# Altium PCB JacdacMicroBitBackPack 94.PcbDoc
Units mm, origin at the board's own origin, x right, y up, seen from the top; angles counter-clockwise.
Board outline 35.46 x 12 mm, 2 copper layers (Top Layer, Bottom Layer), stack 1.525 mm thick; 15 components, 7 nets, 39 pads, 6 vias.
Unrouted connection lines stored in the file: 3.
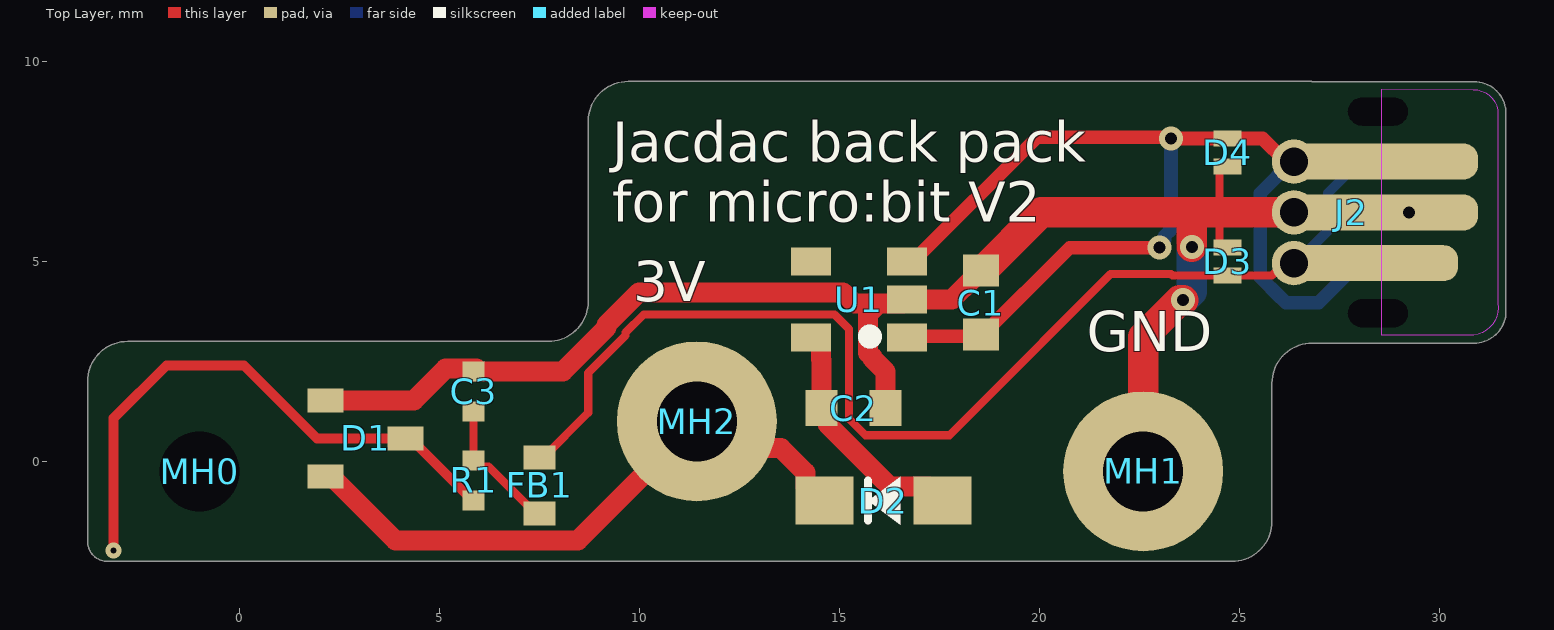
[diagram p0: Top Layer view]
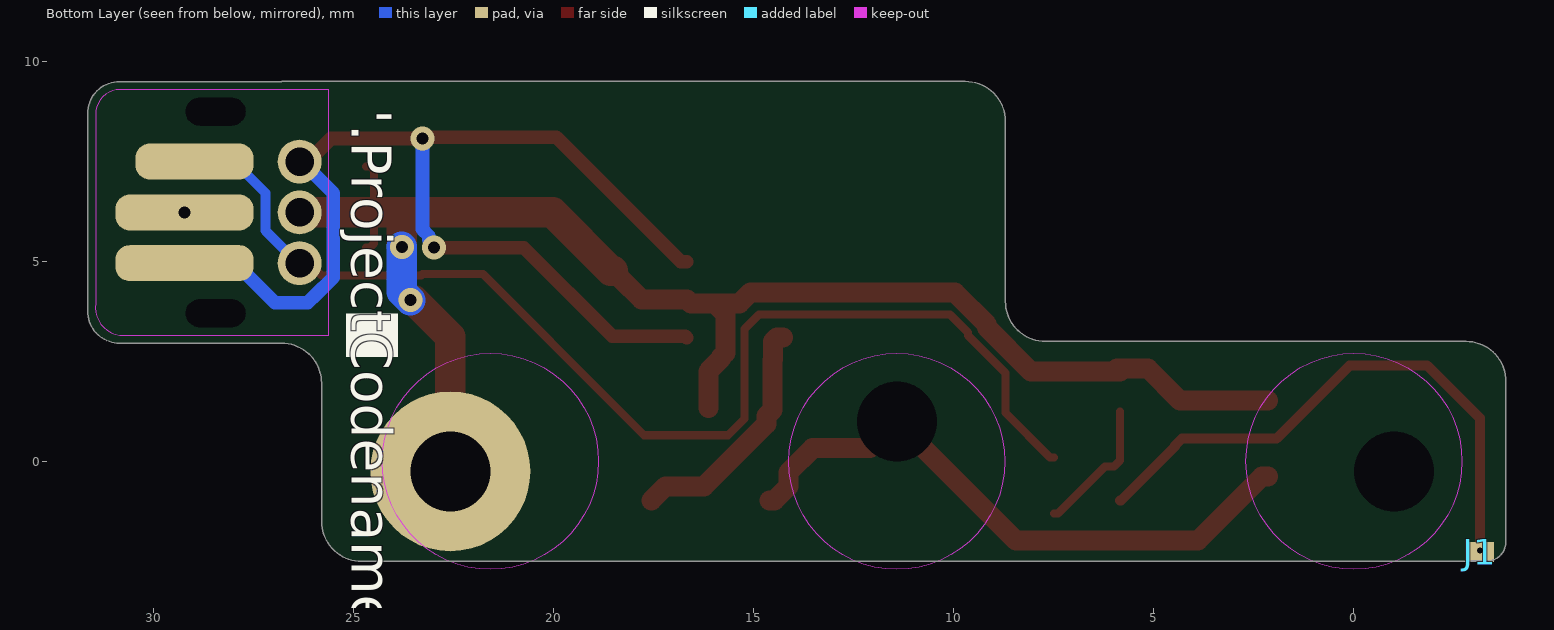
[diagram p1: Bottom Layer view, seen from below]

## Layer stack, top to bottom
Top Solder: solder mask 0.0102, Solder Resist, Dk 3.5
Top Layer: signal copper 0.0356
Dielectric 1: core 1.454, FR-4, Dk 4.2
Bottom Layer: signal copper 0.0356
Bottom Solder: solder mask 0.0102, Solder Resist, Dk 3.5

## Board outline
-3.8,-2 ccw(c-3.3,-2) -3.3,-2.5 24.809,-2.5 ccw(c24.809,-1.5) 25.809,-1.5 25.809,0.955 25.81,0.955 25.81,1.955 cw(c26.81,1.955) 26.81,2.955 30.86,2.955 ccw(c30.86,3.755) 31.66,3.755 31.66,8.695 ccw(c30.86,8.695) 30.86,9.495 26.81,9.495 26.81,9.5 9.715,9.5 ccw(c9.715,8.5) 8.715,8.5 8.715,4 cw(c7.715,4) 7.715,3 -2.8,3 ccw(c-2.8,2) -3.8,2

## Design rules (kind name [scope] priority, off if disabled: settings)
AssemblyTestPointUsage [All] p1: valid=2
BoardOutlineClearance IGNORE_ALIGNMENT_HOLES [InComponent('J1')] p1: gap=0.075 ignorepadtopadclearanceinfootprint=FALSE except(0: Track-OutlineEdge SMDPad-OutlineEdge THPad-OutlineEdge Via-OutlineEdge)
BoardOutlineClearance IGNORE_KEEPOUT [IsKeepOut] p2: gap=0 ignorepadtopadclearanceinfootprint=FALSE
BoardOutlineClearance "allow back pack connection on board edge" [(IsVia And InNet('JD_DATA_MCU')) or (IsPad And InNet('JD_DATA_MCU'))] p3: gap=0 ignorepadtopadclearanceinfootprint=FALSE
BoardOutlineClearance [All] p4: gap=0.25 ignorepadtopadclearanceinfootprint=FALSE except(0.15: Text-OutlineEdge)
Clearance CLEARANCE_MH [IsKeepOut vs InComponent('MH1') or InComponent('MH2')] p1: gap=0 ignorepadtopadclearanceinfootprint=FALSE except(1: THPad-Fill THPad-Poly THPad-Region)
Clearance CLEARANCE_POLY_DC_DC [InNamedPolygon('DC_DC_VUBIT') or InNamedPolygon('DC_DC_4V05') or InNamedPolygon('DC_DC_GND') or InComponent('J1')] p2: gap=0 ignorepadtopadclearanceinfootprint=FALSE except(0.15: Fill-Fill Fill-Poly Fill-Region Poly-Poly Poly-Region Region-Region)
Clearance [All] p3: gap=0.125 ignorepadtopadclearanceinfootprint=FALSE
DiffPairsRouting [All] p1: maxlimit=2 minlimit=0.15 mostfreqgap=0.15 toplayer_minwidth=0.15 toplayer_maxwidth=2 toplayer_prefwidth=0.15 bottomlayer_minwidth=0.15 bottomlayer_maxwidth=2 bottomlayer_prefwidth=0.15 maxuncoupledlength=25
FabricationTestPointUsage [All] p1: valid=2 allowmultiple=FALSE
HoleSize HoleSize_1 [IsVia And InNet('JD_DATA_MCU')] p1: absolutevalues=TRUE maxlimit=2.54 minlimit=0.15 maxpercent=80.000 minpercent=20.000
HoleSize [All] p2: absolutevalues=TRUE maxlimit=5 minlimit=0.2 maxpercent=80.000 minpercent=20.000
MinimumSolderMaskSliver [All] p1: minsoldermaskwidth=0.005
PlaneClearance [All] p1: clearance=0.3
PlaneConnect [All] p1: planeconnectstyle=Relief reliefexpansion=0.5 reliefentries=4 reliefconductorwidth=0.2 reliefairgap=0.3
PolygonConnect CONNECT_POLY_DC_DC [IsNamedPolygon('DC_DC_GND') or IsNamedPolygon('DC_DC_VUBIT') or IsNamedPolygon('GND') or IsNamedPolygon('DC_DC_4V05')] p1: connectstyle=Relief reliefconductorwidth=0.254 reliefentries=4 polygonreliefangle="90 Angle" airgapwidth=0
PolygonConnect [All] p2: connectstyle=Relief reliefconductorwidth=0.2 reliefentries=4 polygonreliefangle="90 Angle" airgapwidth=0.2
RoutingVias RoutingVias_1 [IsVia And InNet('JD_DATA_MCU')] p1: holewidth=0.2 width=0.6 viastyle="Through Hole" minholewidth=0.15 minwidth=0.4 maxholewidth=0.5 maxwidth=1
RoutingVias [All] p2: holewidth=0.3 width=0.6 viastyle="Through Hole" minholewidth=0.3 minwidth=0.6 maxholewidth=0.3 maxwidth=0.8
SilkToSilkClearance [All] p1: silktosilkclearance=0.001
SilkToSolderMaskClearance [IsPad] p1: minsilkscreentomaskgap=0.05 clearancetoexposedcopper=TRUE
SolderMaskExpansion SolderMaskExpansion_1 [IsVia] p1: expansion=0.102 istentingtop=TRUE useseparateexpansions=TRUE expansionbottom=0.102 istentingbottom=TRUE
SolderMaskExpansion [All] p2: expansion=0.075 istentingtop=FALSE
Width [All] p1: maxlimit=2 minlimit=0.15 preferedwidth=0.15 minimp=50.000000 maximp=50.000000 favimp=50.000000
21 further rules are at their usual default settings.

## Components (designator, comment, footprint, x,y, rotation, side; value= is the part's Value field where it differs from the comment)
C1 "1uF 16V" "C0603 - without outline" 18.53,3.969 r270 top
C2 "1uF 16V" "C0603 - without outline" 15.343,1.329 r180 top
C3 "CL05C330JB51PNC" "C0402_0.55MM - without outline" 5.85,1.75 r270 top
D1 "BAT54S" "NXP-BAT54S-TO-236AB - without outline" 3.15,0.575 r0 top
D2 "MBR120VLSFT3G" MBR120VLSFT3G 16.093,-0.978 r0 top
D3 "RCLAMP0521P-N" "TVS 0402 - L" 24.7,5 r90 top
D4 "RCLAMP0521P-N" "TVS 0402 - L" 24.7,7.722 r270 top
FB1 "TDK MPZ1608S102ATA00" "TDK MPZ1608 0.8mm - without outline" 7.5,-0.6 r270 top
J1 "microbit edge connector for Jacdac back pack" MICROBIT_EDGE_CONNECTOR_BACK_PACK -3.15,-2.27 r180 bottom
J2 "Jacdac edge connector" JACDAC_EDGE_CONNECTOR_NO_TRACES 25.81,6.225 r270 top
MH0 "MH_4.0MMK_0MMC_2.0MMD_NPTH" MH_4.0MMK_0MMC_2.0MMD_NPTH -1,-0.25 r0 top
MH1 "MH_5.0MMK_4.0MMC_2.0MMD_PTH" MH_5.0MMK_4.0MMC_2.0MMD_PTH#1 22.59,-0.25 r0 top
MH2 "MH_5.0MMK_4.0MMC_2.0MMD_PTH" MH_5.0MMK_4.0MMC_2.0MMD_PTH#2 11.43,1 r0 top
R1 "0402WGF2200TCE" "R0402 - Without outline" 5.85,-0.475 r90 top
U1 "ME6211C33M5G-N" MICRONE-SOT23-5 15.48,4.046 r180 top

## Footprints (in the part's own frame and the unit in brackets; to place one, negate y for a bottom-side part, rotate by r counter-clockwise, add the part's x,y. Pads: shape width x height; smd on the part's side, far side on the other; paste and mask are expansions set on the pad)
"C0402_0.55MM - without outline" [mm]
  rect 0.5x0.55 smd: 1(-0.5,0) 2(0.5,0)
  body extent -0.5,-0.25 0.5,0.25, height 0.55
"C0603 - without outline" [mm]
  rect 0.8x0.9 smd: 1(-0.8,0) 2(0.8,0)
  body extent -0.9,-0.5 0.9,0.5, height 0.9
JACDAC_EDGE_CONNECTOR_NO_TRACES [mm] "JacDac 3 pin connector with no traces"
  rrect78% 0.9x2.95 smd far side paste-1 mask+0: 1(-1.27,3.175)
  rrect78% 0.9x4.3 smd paste-1 mask+0: 1(1.27,2.5)
  round 1.11 / inner round 0.71 / far side round 1.1 hole 0.71 paste-0.254 mask+0: 1(1.27,0.55) 2(0,0.55) 3(-1.27,0.55)
  rrect78% 0.9x3.45 smd far side paste-1 mask+0: 2(0,3.425) 3(1.27,3.425)
  rrect78% 0.9x4.8 smd paste-1 mask+0: 2(0,2.75) 3(-1.27,2.75)
  round 0 hole 0.7 slot 1.5 at 90 deg unplated: ""(-2.52,2.65) ""(2.52,2.65)
  Top Layer keep-out region: -3.075,2.75 -3.07,5.033 -2.987,5.341 -2.761,5.567 -2.453,5.65 -2.453,5.65 2.27,5.65 2.545,5.635 2.794,5.516 2.978,5.31 3.07,5.05 3.07,5.05 3.07,2.75
  Bottom Layer lines w0.2: -1.126,0.85 -1.27,0.85
  Bottom Layer keep-out region: -3.07,-0.173 -3.07,5.033 -3.023,5.269 -2.889,5.469 -2.689,5.603 -2.453,5.65 -2.453,5.65 2.27,5.65 2.545,5.635 2.794,5.516 2.978,5.31 3.07,5.05 3.07,5.05 3.07,-0.173
MBR120VLSFT3G [mm] "SODFL, 2-Leads, Body 1.65x3.60mm, IPC Medium Density"
  rect 1.45x1.2 smd: 1(-1.475,0) 2(1.475,0)
  silkscreen extent -0.38,-0.6 0.42,0.6, body extent -1.73,-0.82 1.72,0.82, height 0.95
MH_4.0MMK_0MMC_2.0MMD_NPTH [mm] "Mounting hole 4.0mm clearance, no copper and 2.0mm NPTH"
  round 0 hole 2 unplated mask+0.05: 1(0,0)
MH_5.0MMK_4.0MMC_2.0MMD_PTH#1 [mm] "Mounting hole 5.0mm clearance, 4.0mm annular ring and 2.0mm PTH"
  round 4 hole 2 mask+0.5: 1(0,0)
MH_5.0MMK_4.0MMC_2.0MMD_PTH#2 [mm] "Mounting hole 5.0mm clearance, 4.0mm annular ring and 2.0mm PTH"
  round 4 / inner round 4 / far side round 0 hole 2 unplated mask+0.5: 1(0,0)
MICROBIT_EDGE_CONNECTOR_BACK_PACK [mm]
  rect 0.7x0.5 smd paste-1: 1(0,0)
MICRONE-SOT23-5 [mm]
  rect 1x0.7 smd: 1(-1.2,0.95) 2(-1.2,0) 3(-1.2,-0.95) 4(1.2,-0.95) 5(1.2,0.95)
  silkscreen extent -0.33,0.88 -0.23,0.97, body extent -1.32,-1.5 1.32,1.5, height 1.11
"NXP-BAT54S-TO-236AB - without outline" [mm] "SOT23, 3-Leads, Body 2.90x2.30mm, Pitch 0.95mm, IPC Medium Density"
  rect 0.9x0.6 smd: 1(-1,0.95) 2(-1,-0.95) 3(1,0)
  body extent -1.32,-1.5 1.32,1.5, height 1.12
"R0402 - Without outline" [mm]
  rect 0.5x0.55 smd: 1(-0.5,0) 2(0.5,0)
  body extent -0.5,-0.25 0.5,0.25, height 0.35
"TDK MPZ1608 0.8mm - without outline" [mm]
  rect 0.6x0.8 smd paste-0.1: 1(-0.7,0) 2(0.7,0)
  body extent -0.8,-0.4 0.8,0.4, height 0.8
"TVS 0402 - L" [mm] "TVS 0402 RoHS"
  rect 0.4x0.7 smd paste-0.038 mask+0.05: 1(-0.35,0) 2(0.35,0)
  body extent -0.5,-0.3 0.5,0.3, height 0.5

## Part data
C1 C2: library part CL10A105KO8NNNC, "SMD Multilayer Ceramic Capacitor, 1 µF, 16 V, 0603 [1608 Metric], ± 10%, X5R, CL Series", Capacitance=1uF, Case Code (Imperial)=0603, Case Code (Metric)=1608, Dielectric=X5R, Manufacturer=Samsung, Max Operating Temperature=85°C, Min Operating Temperature=-55°C, Package Quantity=1, Supplier Part Number 1=1276-1034-1-ND, Tolerance=10%, Voltage=16V, Case/Package=0603, Category="Ceramic Capacitors", ComponentLink1Description="Online datasheet", ComponentLink1URL=https://datasheet.lcsc.com/lcsc/1811021622_Samsung-Electro-Mechanics-CL10A105KO8NNNC_C1592.pdfq, Construction=Flat, Contact Plating=Tin, Depth=0.8mm, Height=0.8mm, Lead Free="Lead Free", Length=1.6mm, Manufacturer 1=Samsung, Manufacturer Part Number=CL10A105KO8NNNC, Manufacturer Part Number 1=CL10A105KO8NNNC, Material=Ceramic, Mount="Surface Mount", Packaging="Tape and Reel", Pricing 1="1=0.10000, 10=0.03600, 50=0.01960, 100=0.01600, 500=0.01144, 1000=0.00898 (USD)", Radiation Hardening=No, RoHS=Yes, RoHS Compliant=Yes, Series=CL, Stock 1=3575337, Supplier 1=Digi-Key, Supplier 2=Farnell, Supplier 3=RSComponents, Supplier 4=Mouser, Supplier 5=LCSC, Supplier Part Number 2=3013384, Supplier Part Number 3=7664780, Supplier Part Number 4=187-CL10A105KO8NNNC, Supplier Part Number 5=C1592, Thickness=0.035inch, Voltage Rating=16V, Voltage Rating (DC)=16V, Width=0.031inch
C3: "CAP CER 33PF 50V NP0 0402", Capacitance=33pF, Case Code (Imperial)=0402, Case Code (Metric)=1005, Manufacturer=Samsung, Max Operating Temperature=125°C, Min Operating Temperature=-55°C, Ratings=AEC-Q200, Supplier Part Number 1=1276-6515-1-ND, Tolerance=5%, Voltage Rating=50V, Case/Package=0402, Category=Capacitors, Checked=?, ComponentLink1Description="Samsung datasheet online", ComponentLink1URL=http://www.samsungsem.com/kr/support/library/product-catalog/mlcc.jsp, Created=DG, Lead Free="Lead Free", Length=0.039inch, Manufacturer Part Number=CL05C330JB51PNC, Mount="Surface Mount", Packaging="Tape and Reel", Pricing 1="1=0.10000, 10=0.07500, 50=0.04060, 100=0.03320, 500=0.02374, 1000=0.01865, 2500=0.01696, 5000=0.01560 (USD)", Pricing 2="1=0.11000, 10=0.08200, 100=0.03600, 500=0.02600, 1000=0.02000, 2500=0.01800 (USD)", Pricing 3="10000=0.00780 (USD)", RoHS=Yes, Stock 1=250654, Stock 2=97900, Stock 3=100000, Supplier 1=Digi-Key, Supplier 2=Mouser, Supplier 3="Future Electronics", Supplier Part Number 2=187-CL05C330JB51PNC, Supplier Part Number 3=6022520, Thickness=0.022inch, Width=0.02inch
D1: "DIODE ARRAY SCHOTTKY 30V SOT23", Manufacturer=Nexperia, Manufacturer Part Number=BAT54S,235, Supplier Part Number 1=1727-1868-1-ND, Category="Rectifier Diodes", ComponentLink1Description="NXP datasheet online", ComponentLink1URL=https://assets.nexperia.com/documents/data-sheet/BAT54_SER.pdf, Pricing 1="1=0.13000, 10=0.11900, 100=0.05610, 500=0.03326, 1000=0.02185, 5000=0.02138 (USD)", RoHS=No, Stock 1=14011, Supplier 1=Digi-Key, Supplier 2=Mouser, Supplier 3=RSComponents, Supplier Part Number 2=771-BAT54S235, Supplier Part Number 3=1707990
D2: "DIODE SCHOTTKY 20V 1A SOD123FL", Average Rectified Current=1A, Forward Voltage=340mV, Manufacturer="ON Semiconductor", Max Forward Surge Current (Ifsm)=45A, Max Operating Temperature=125°C, Max Repetitive Reverse Voltage (Vrrm)=20V, Max Reverse Leakage Current=600uA, Min Operating Temperature=-65°C, Package Quantity=10000, Supplier Part Number 1=MBR120VLSFT3GOSCT-ND, Category="Schottky Diodes", ComponentLink4Description="On Semi datasheet online", ComponentLink4URL=https://datasheet.ciiva.com/6380/mbr120vlsft1-d-6380910.pdf, Current Rating=1A, Element Configuration=Single, Forward Current=1A, Halogen Free="Halogen Free", Lead Free="Lead Free", Manufacturer Part Number=MBR120VLSFT3G, Max Reverse Voltage (DC)=20V, Max Surge Current=45A, Number of Pins=2, Output Current=1A, Packaging="Tape and Reel", Peak Non-Repetitive Surge Current=45A, Peak Reverse Current=600uA, Polarity=Standard, Pricing 1="1=0.39000, 10=0.28600, 100=0.19920, 500=0.12616, 1000=0.10292, 2000=0.09960, 5000=0.09628 (USD)", Radiation Hardening=No, REACH SVHC="No SVHC", RoHS=Yes, Stock 1=32481, Supplier 1=Digi-Key, Supplier 2=Mouser, Supplier 3=RSComponents, Supplier Part Number 2=863-MBR120VLSFT3G, Supplier Part Number 3=1867479, Voltage Rating (DC)=20V
D3 D4: "Bidirectional 5V (Max) 6V 16V 3.5A (8/20us) 0402 TVS RoHS", Manufacturer="Born Semiconductor", Package=0402, Supplier1 Part Number=C316043, Checked By=?, ComponentLink1Description="Online datasheet", ComponentLink1URL=https://datasheet.lcsc.com/szlcsc/Bourne-Semicon-Shenzhen-RCLAMP0521P-N_C316043.pdf, Created By="D Gakure", Manufacturer Part Number=RCLAMP0521P-N, Supplier1=LCSC
FB1: "0603 1k@100MHz 0.8A chip", Case Code (Imperial)=0603, Case Code (Metric)=1608, Current Rating=800mA, DC Resistance (DCR)=300mR, Manufacturer=TDK, Manufacturer Part Number=MPZ1608S102ATA00, Package Quantity=4000, Supplier Part Number 1=445-8694-1-ND, Tolerance=25%, Case/Package=0603, ComponentLink2Description="datasheet online", ComponentLink2URL=https://www.mouser.co.uk/datasheet/2/400/eads_commercial_power_mpz1608_en-923650.pdf, ComponentLink3Description=datasheet, ComponentLink3URL="Y:\System\Altium\Libraries 2014\TDK\Datasheets\eads_commercial_power_mpz1608_en-923650.pdf", Core Material=Ferrite, Height=0.037inch, Impedance="1kR @ 100MHz", Length=0.063inch, Max DC Current=800mA, Mount="Surface Mount", Packaging="Tape and Reel", Pricing 1="1=0.1, 10=0.079, 25=0.0716, 50=0.0644, 100=0.0472, 250=0.03432, 500=0.03146, 1000=0.02717 (USD)", Stock 1=113542, Supplier 1=Digi-Key, Supplier 2=Mouser, Supplier Part Number 2=810-MPZ1608S102ATA00, Width=0.031inch
J1: "special pad for Jacdac back pack"
J2: "3 pin jacdac edge connector 1.27mm pitch", Manufacturer Part Number=JACDAC_EDGE_CONNECTOR, Checked By=?, ComponentLink1Description="Yuliang JACDAC cable connector drawing online", ComponentLink1URL=https://github.com/microsoft/jacdac-mdk/blob/main/connector/JACDAC-Connector-by-Yuliang-2020-11-28.pdf, ComponentLink2Description="JACDAC PCB edge connector spec onlin", ComponentLink2URL=https://github.com/microsoft/jacdac-mdk/blob/main/connector/JACDAC_PCB_Edge_Connector_Drawing_JD-PEC-01_rev_01.pdf, Created By="D. Gakure", PCB Type="1.6mm FR4"
MH0: "Mounting Hole 4.0mm keepout, no copper and 2.0mm drill NPTH", Hole Diameter=2.0mm, Hole Size=M2, Hole Type=NPTH
MH1 MH2: "Mounting Hole 5.0mm keepout, 4.0mm annular ring and 2.0mm drill PTH", Annular Ring=4.0mm, Hole Clearance=5.0mm, Hole Diameter=2.0mm, Hole Size=M2, Hole Type=PTH
R1: "RES SMD 220 OHM 1% 1/16W 0402", Case Code (Imperial)=0402, Manufacturer="Uniroyal Elec", Resistance=220R, Tolerance=1%, Manufacturer Part Number=0402WGF2200TCE
U1: "6V 260mV @ 200mA(typ) - - Fixed 3.3V SOT-23-5 Linear Voltage Regulators (LDO) ROHS", Case/Package=SOT-23-5, Dropout Voltage=200mV, Manufacturer="MICRONE(Nanjing Micro One Elec)", Max Input Voltage=6, Min Output Voltage=3.3V, Output Current=500mA, Supplier Part Number=C82942, Category="Voltage Regulators - Linear", Checked=?, ComponentLink3Description="On Semi datasheet online", ComponentLink3URL=https://datasheet.lcsc.com/lcsc/1811131510_MICRONE-Nanjing-Micro-One-Elec-ME6211C33M5G-N_C82942.pdf, Created=DG, Manufacturer Part Number=ME6211C33M5G-N, Mount="Surface Mount", Number of Regulators=1, Output Configuration=Positive, Output Type=Fixed, Pricing 1="1=0.33000, 10=0.24900, 25=0.21760, 100=0.12440, 250=0.11664, 500=0.09330, 1000=0.07153 (USD)", Stock 1=32529, Supplier 1=LCSC

## Via types
v1: diameter 0.6, hole 0.3, Top Layer to Bottom Layer, tented both sides, 5 vias
v2: diameter 0.4, hole 0.15, Top Layer to Bottom Layer, tented both sides, 1 vias

## Nets (pads, with @x,y where several pads share a name; then routed paths per layer and width w, separated by ;. In a path a pad name is that pad's centre, name@x,y a point inside that pad or via, vN(x,y) a via of type N, cw(c..) or ccw(c..) an arc to the next point about the centre after c; other vN are vias at no path point)
GND: C1.1 C2.1 C3.1 D1.1 D3.2 D4.2 J2.2 MH1.1 U1.2 | length 38.6
  Top Layer w0.2: D3.2 24.6,5.35 24.5,5.45 24.5,6.208 24.483,6.225 24.496,6.238 24.496,7.272 24.596,7.372 D4.2
  Top Layer w0.5: D1.1 4.356,1.525 5.151,2.32 5.92,2.32 C3.1 8.079,2.25 9.172,3.342 9.172,3.416 9.979,4.224 15.091,4.224 15.368,3.946 15.982,3.946 ; C2.1 16.143,2.253 15.819,2.576 15.819,2.607 15.712,2.714 15.712,3.676 15.982,3.946 ; C1.1@18.33,4.569 17.807,4.046 U1.2 16.58,3.946 15.982,3.946
  Top Layer w0.762: C1.1 18.58,4.769 20.036,6.225 24.483,6.225 J2.2@26.36,6.225 ; MH1.1 22.59,3.115 23.507,4.032 v1(23.59,4.032) ; v1(23.804,5.361) 23.804,6.225
  Bottom Layer w0.762: v1(23.59,4.032) 23.804,4.246 v1(23.804,5.361)
  other v1: 29.235,6.225
JD_DATA: D3.1 FB1.1 J2.1 | length 29.6
  Top Layer w0.203: FB1.1 7.6,0.1 8.715,1.215 8.715,2.212 9.649,3.145 9.649,3.219 10.103,3.673 14.874,3.673 15.235,3.311 15.235,1.066 15.649,0.653 17.747,0.653 18.373,1.279 21.777,4.683 23.286,4.683 23.319,4.65 25.809,4.65 26.115,4.955 J2.1@26.36,4.955
  Bottom Layer w0.25: J2.1@26.35,4.955 26.36,4.955 26.4,4.955 27.211,5.766 27.211,6.706 28,7.495 J2.1@28.975,7.495
JD_DATA_MCU: D1.3 J1.1 R1.1 | length 14.3
  Top Layer w0.25: v2(-3.15,-2.225) -3.15,1.079 -1.829,2.4 0.108,2.4 1.933,0.575 D1.3 4.3,0.575 4.475,0.4 4.475,0.375 5.825,-0.975 R1.1
JD_PWR: C1.2 D4.1 J2.3 U1.1 U1.3 | length 29
  Top Layer w0.34: U1.1 16.716,3.132 18.543,3.132 20.755,5.344 v1(22.998,5.344) ; U1.3 16.83,4.996 19.94,8.106 23.252,8.106 v1(23.286,8.072) 25.575,8.072 26.152,7.495 J2.3@26.36,7.495
  Bottom Layer w0.34: v1(22.998,5.344) 22.998,5.414 23.128,5.544 23.128,5.641 23.286,5.799 v1(23.286,8.072) ; J2.3@26.36,7.495 26.306,7.495 25.515,6.704 25.515,4.605 26.01,4.11 26.019,4.11 26.16,3.969 26.974,3.969 27.96,4.955 J2.3@29.235,4.955
NetC2_2: C2.2 D2.2 U1.5 | length 6.1
  Top Layer w0.5: U1.5 14.43,3.096 14.53,2.996 14.53,2.542 14.543,2.529 14.543,1.279 14.693,1.129 14.693,0.935 16.255,-0.628 17.218,-0.628 D2.2
NetC3_2: C3.2 FB1.2 R1.2 | length 3.4
  Top Layer w0.203: C3.2 R1.2 5.998,-0.123 6.223,-0.123 7.4,-1.3 FB1.2
VBIT: D1.2 D2.1 MH2.1 | length 15.4
  Top Layer w0.5: D1.2 2.3,-0.375 3.9,-1.975 8.455,-1.975 MH2.1 12.1,0.33 13.535,0.33 14.143,-0.278 14.143,-0.628 14.493,-0.978 D2.1
pads on no net: J2. MH0.1 U1.4

## Keep-outs
Bottom Layer:
  circle w0.01: c0,0 r2.7
  circle w0.01: c11.43,0 r2.7
  circle w0.01: c21.59,0 r2.7

## Other copper
Top Layer:
  text "Top Layer" at -3.273,15.67 h1.7
Bottom Layer:
  text "Bottom Layer" at -3.274,14.17 h1.7

## Silkscreen, mask and mechanical layers (free items; w line width, h text height)
Top Overlay:
  text "Top Overlay" at 9.727,12.87 h1.7
  text "Jacdac back pack / for micro:bit V2" at 9.322,5.992 h1
  text "3V" at 9.843,4 h1
  text "GND" at 21.176,2.75 h1
Bottom Overlay:
  region: 23.9,3.7 23.9,2.607 25.2,2.607 25.2,3.7
  text "Bottom Overlay" at 9.726,11.37 h1.7
  text "'.ProjectCodenameID'-'.ProjectRevision'" at 25.06,8.805 h1 r90
Top Paste:
  text "Top Paste" at 21.727,15.737 h1.7
Bottom Paste:
  text "Bottom Paste" at 21.726,14.26 h1.7
Top Solder:
  text "Top Solder (resist)" at 21.727,12.937 h1.7
Bottom Solder:
  region: -3.8,9.5 -3.8,-2.5 22.59,-2.5 22.59,9.5
  text "Bottom Solder (resist)" at 21.726,11.447 h1.7
Fabrication Notes:
  lines w0.1: 9.4,-5.2 9.4,2.819 ; 25.558,10.175 25.56,-8.451 ; 25.568,-7.801 28.547,-7.801 ; 28.197,-8.151 28.547,-7.801 ; 28.197,-7.451 28.547,-7.801 ; 29.275,3.43 30,2.705 ; 29.4,8.7 30,8.1 30,2.705 ; 30,0.3 30,2.705
  text "Fabrication Notes" at -3.274,12.885 h1.7
  text "non-plated slots x2" at 30.401,0.893 h1.7
  text "no board edge pips/ / rat's teeth/mouse bites  / right of this line - make  / sure board edge is clean" at 26.711,-6.755 h1.7
  text "no silk or solder resist on most of bottom layer" at -0.7,-8.2 h1.7
Alignment:
  circle w0.01: c11.43,0 r2
  circle w0.01: c21.59,0 r2
  circle w0.01: c0,0 r2
  lines w0.05: -3.653,-2.021 ccw(c-2.8,-1.5) -2.8,-2.5 -2.8,-2.021 -3.653,-2.021
Board Cutout:
  text "Board Cutout" at -3.274,10.335 h1.7
Board Outline:
  lines w0.05: 25.809,0.955 25.809,-1.5 cw(c24.809,-1.5) 24.809,-2.5 -3.3,-2.5 cw(c-3.3,-2) -3.8,-2 -3.8,2 cw(c-2.8,2) -2.8,3 7.715,3 ccw(c7.715,4) 8.715,4 8.715,8.5 cw(c9.715,8.5) 9.715,9.5 26.81,9.5
  text "Board Outline" at -3.274,11.585 h1.7
Top Assy:
  text "Top Assy" at 9.727,15.77 h1.7
Bottom Assy:
  text "Bottom Assy" at 9.726,14.37 h1.7

## Text inside footprints (layer, text, board x,y; h text height)
J2: Mechanical 9 "Jacdac / cable connector  / body" at 35.818,11.046 h1.7 r270